# Altium PCB Mainboard.PcbDoc
Units mil, origin at the board's own origin, x right, y up, seen from the top; angles counter-clockwise.
Board outline 2210 x 1600 mil, 2 copper layers (Top Layer, Bottom Layer); 37 components, 49 nets, 203 pads, 62 vias.
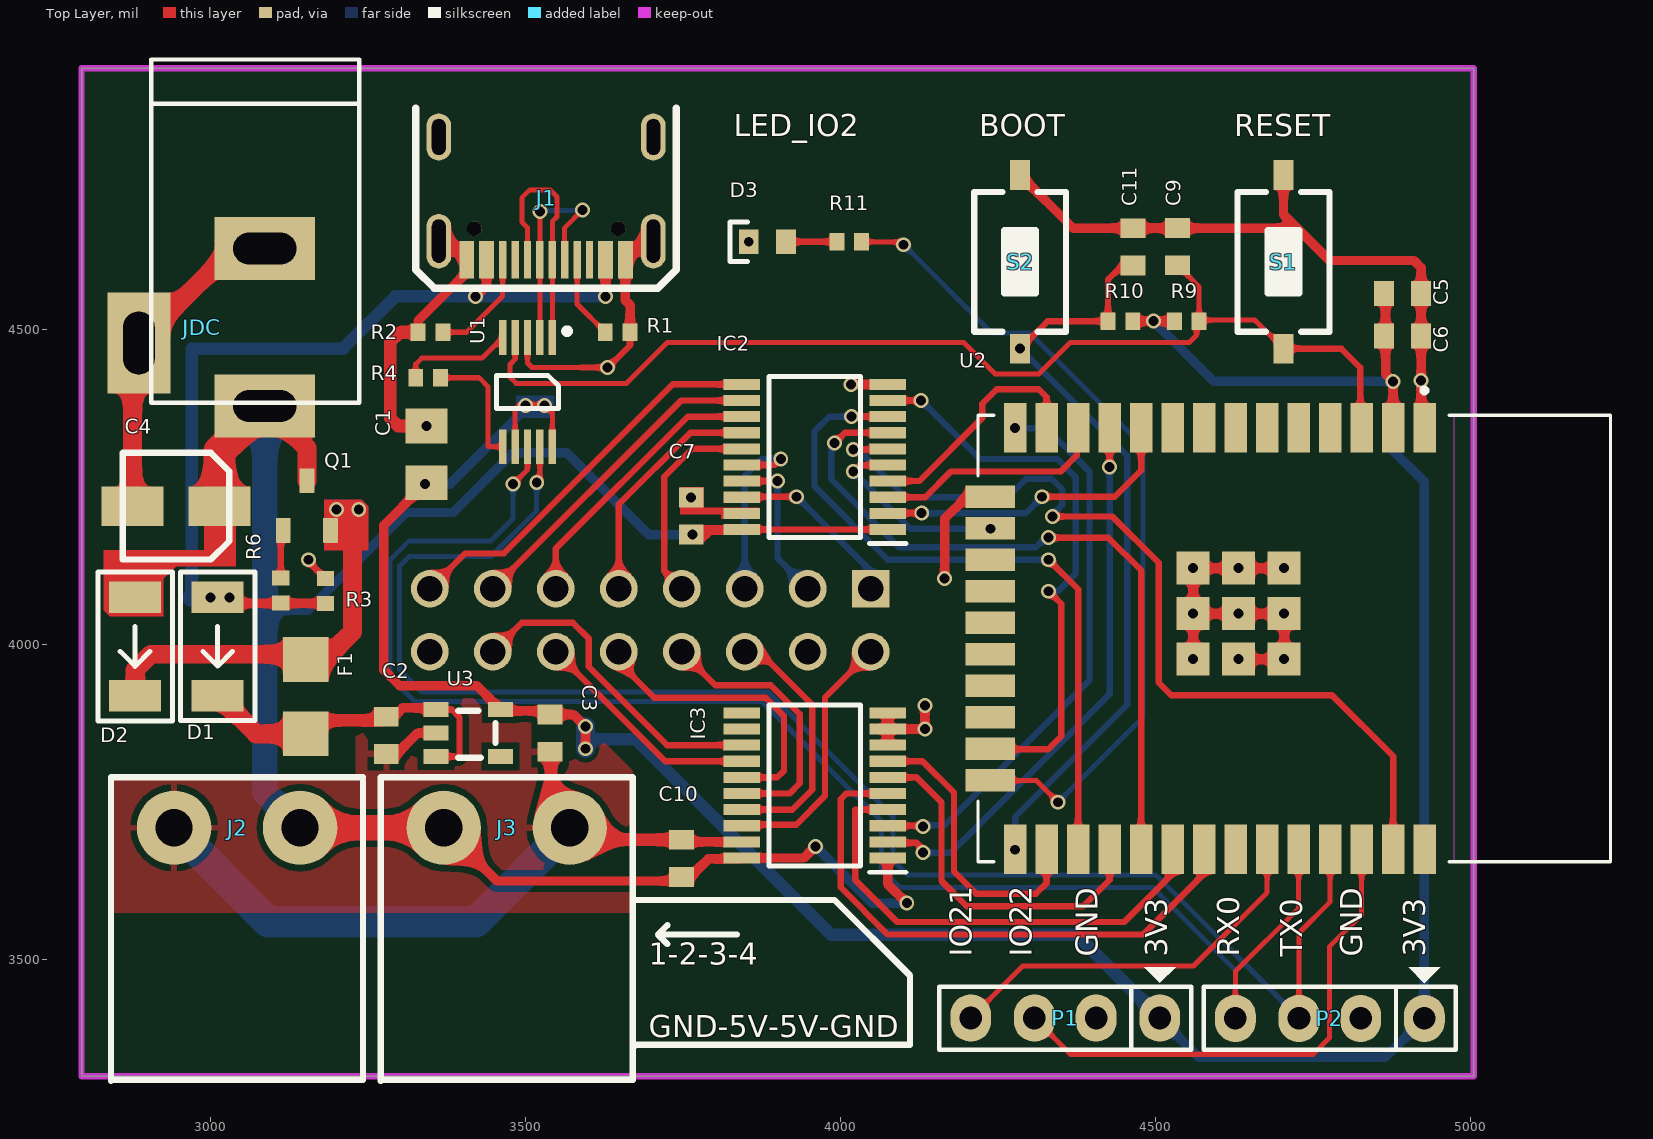
[diagram p0: Top Layer view]
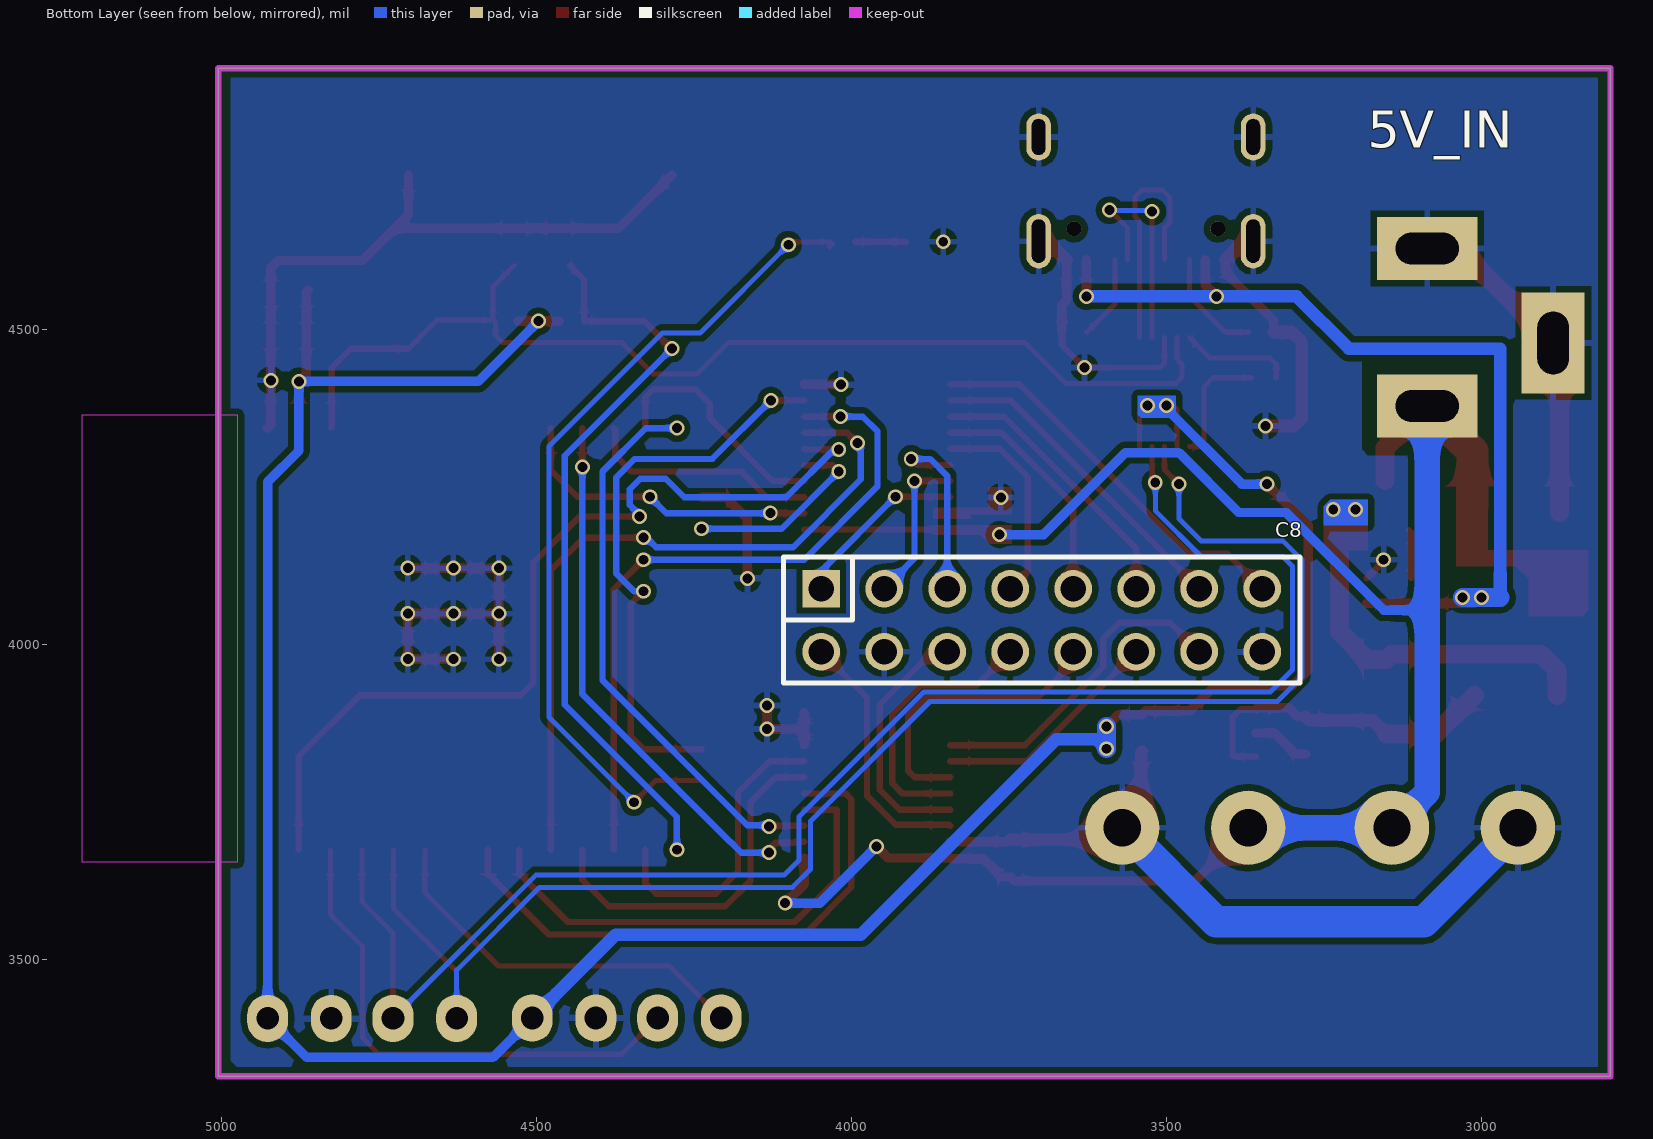
[diagram p1: Bottom Layer view, seen from below]

## Layer stack, top to bottom
Top Solder: solder mask 0.4, Solder Resist, Dk 3.5
Top Layer: signal copper 1.4
Dielectric 1: dielectric 12.6, FR-4, Dk 4.8
Bottom Layer: signal copper 1.4
Bottom Solder: solder mask 0.4, Solder Resist, Dk 3.5

## Board outline
2795,3315 2795,4915 5005,4915 5005,3315

## Design rules (kind name [scope] priority, off if disabled: settings)
Clearance [All] p1: gap=10 ignorepadtopadclearanceinfootprint=FALSE except(0: Arc-Hole Track-Hole SMDPad-Hole THPad-Hole Via-Hole Fill-Hole Poly-Hole Region-Hole Text-Hole; 5: Arc-Arc Arc-Track Arc-Via Track-Track Track-Via)
PolygonConnect [All] p1: connectstyle=Relief reliefconductorwidth=10 reliefentries=4 polygonreliefangle="90 Angle" airgapwidth=10
RoutingVias [All] p1: holewidth=28 width=50 viastyle="Through Hole" minholewidth=28 minwidth=50 maxholewidth=28 maxwidth=50
SolderMaskExpansion [All] p1: expansion=4 istentingtop=FALSE
Width [All] p1: maxlimit=100 minlimit=8 preferedwidth=10
30 further rules are at their usual default settings.

## Components (designator, comment, footprint, x,y, rotation, side; value= is the part's Value field where it differs from the comment)
C1 "1uF" CAP_0805 3342.54,4302.25 r270 top
C2 "100nF" CAP_0603 3278.68,3856.16 r90 top
C3 "100nF" CAP_0603 3538.68,3859.71 r90 top
C4 "1uF" "tu nhom 4 (B)" 2945,4220 r180 top
C5 "100nF" CAP_0603 4891.9,4557.63 r180 top
C6 "100nF" CAP_0603 4891.9,4490.17 r180 top
C7 "1nF" CAP_0603 3762.69,4204.46 r270 top
C8 "JP8x2" JP8-C2T 3697.88,4038.98 r180 bottom
C9 "1nF" CAP_0603 4534.74,4631.9 r90 top
C10 "100nF" CAP_0603 3747.31,3660.94 r90 top
C11 "1nF" CAP_0603 4463.95,4631.74 r90 top
D1 "SS34" "DO-214AC-2 (SMA)" 3011.1,3997.63 r270 top
D2 "SS34" "DO-214AC-2 (SMA)" 2880.04,3997.37 r270 top
D3 "RED" LED_0603_RED 3883.64,4639.72 r0 top
F1 "F1206" FUSE_1206 3150.81,3917.63 r270 top
IC2 "74HC245PW,118" 74hc245pw 3958.89,4298.22 r180 top
IC3 "74HC245PW,118" 74hc245pw 3958.89,3776.73 r180 top
J1 "TYPE-C-31-M-12" TYPE-C-31-M-12 3532.4,4723.39 r180 top
J2 "PW_IN_5V" "DOMINO 2L" 3141.88,3709.5 r180 top
J3 "PW_IN_5V" "DOMINO 2L" 3570,3709.5 r180 top
JDC "Jac DC" DC-IN 2985.88,4504 r270 top
P1 "Header 4" JP4 4406.54,3407.46 r180 top
P2 "UART" JP4 4826.54,3406.96 r180 top
Q1 "FET-P" SSM3J338R,LF-SOT23-F 3152.67,4220.94 r0 top
R1 "5.1K" RES_0402 3646.09,4496.13 r0 top
R2 "5.1K" RES_0402 3348.91,4496.13 r180 top
R3 "100K" RES_0402 3182.22,4085.51 r270 top
R4 "4.7K" RES_0402 3345.2,4423.87 r180 top
R6 "100K" RES_0402 3111.33,4086.29 r90 top
R9 "10K" RES_0402 4549.39,4513.68 r180 top
R10 "10K" RES_0402 4443.94,4513.68 r0 top
R11 "10K" RES_0402 4013.64,4639.72 r0 top
S1 "RESET" SW-SMD 4702.93,4607.88 r270 top
S2 "BOOT" SW-SMD 4284.85,4607.88 r270 top
U1 "CH340E" MSOP-10 3502.87,4401.14 r270 top
U2 "ESP32-WROOM-32D" MODULE_ESP32-WROOM-32D 4720,4010 r270 top
U3 "RT9193-33" RT9193_33 3405,3860 r180 top

## Footprints (in the part's own frame and the unit in brackets; to place one, negate y for a bottom-side part, rotate by r counter-clockwise, add the part's x,y. Pads: shape width x height; smd on the part's side, far side on the other; paste and mask are expansions set on the pad)
74hc245pw [mm] "SOP65P640X110-20N"
  rect 1.475x0.45 smd: 1(-2.938,2.925) 2(-2.938,2.275) 3(-2.938,1.625) 4(-2.938,0.975) 5(-2.938,0.325) 6(-2.938,-0.325) 7(-2.938,-0.975) 8(-2.938,-1.625) 9(-2.938,-2.275) 10(-2.938,-2.925) 11(2.938,-2.925) 12(2.938,-2.275) 13(2.938,-1.625) 14(2.938,-0.975) 15(2.938,-0.325) 16(2.938,0.325) 17(2.938,0.975) 18(2.938,1.625) 19(2.938,2.275) 20(2.938,2.925)
  silkscreen extent -3.67,-3.25 1.85,3.5, body extent -3.21,-3.25 3.21,3.25, height 1
CAP_0603 [mm]
  rect 0.8x1 smd: 1(-0.75,0) 2(0.75,0)
  body extent -0.8,-0.4 0.8,0.4, height 0.51
CAP_0805 [mm]
  rect 1.4x1.7 smd: 1(-1.143,0) 2(1.143,0)
  body extent -1.15,-0.76 1.15,0.79, height 1.01
DC-IN [mil] "Jac DC input"
  rect 100x160 hole 50 slot 100 at 90 deg: 1(125,100) 2(-125,100)
  rect 160x100 hole 50 slot 100 at 0 deg: 3(25,-100)
  silkscreen extent -425,-80 120,250, body extent -410,-105 134,269, height 434
"DO-214AC-2 (SMA)" [mm]
  rect 1.27x2.1 smd: A(-1.985,0) K(1.985,0)
  silkscreen extent -3,-1.5 3,1.5, body extent -2.6,-1.3 2.6,1.3, height 2.42
"DOMINO 2L" [mm]
  round 3 hole 1.5: 1(0,0) 2(5.08,0)
  silkscreen extent -2.54,-2.03 7.62,10.21, body extent -2.5,-1.75 7.58,10.25, height 3.15
FUSE_1206 [mm]
  rect 1.8x1.84 smd: 1(-1.5,0) 2(1.5,0)
  body extent -1.65,-0.82 1.65,0.81, height 0.84
JP4 [mil] "Jumper 4"
  oval 65x75 hole 36: 1(-100,0) 2(1,0) 3(99,0) 4(200,0)
  silkscreen extent -150,-81 250,50, body extent -148,-48 248,50, height 323
JP8-C2T [mm] "16 pins, dual row, straight, gold plating"
  rect 1.52x1.52 hole 1.02: 1(-8.89,1.27)
  round 1.52 hole 1.02: 2(-6.35,1.27) 3(-3.81,1.27) 4(-1.27,1.27) 5(1.27,1.27) 6(3.81,1.27) 7(6.35,1.27) 8(8.89,1.27) 9(8.89,-1.27) 10(6.35,-1.27) 11(3.81,-1.27) 12(1.27,-1.27) 13(-1.27,-1.27) 14(-3.81,-1.27) 15(-6.35,-1.27) 16(-8.89,-1.27)
  silkscreen extent -10.41,-2.54 10.41,2.54, body extent -10.41,-2.54 10.41,2.54, height 8.51
LED_0603_RED [mm]
  rect 0.8x1 smd: A(0.75,0) K(-0.75,0)
  silkscreen extent -1.5,-0.8 -0.8,0.8, body extent -0.8,-0.4 0.8,0.4, height 0.6
MODULE_ESP32-WROOM-32D [mm]
  rect 2x0.9 smd: 1(-8.5,5.26) 2(-8.5,3.99) 3(-8.5,2.72) 4(-8.5,1.45) 5(-8.5,0.18) 6(-8.5,-1.09) 7(-8.5,-2.36) 8(-8.5,-3.63) 9(-8.5,-4.9) 10(-8.5,-6.17) 11(-8.5,-7.44) 12(-8.5,-8.71) 13(-8.5,-9.98) 14(-8.5,-11.25) 25(8.5,-11.25) 26(8.5,-9.98) 27(8.5,-8.71) 28(8.5,-7.44) 29(8.5,-6.17) 30(8.5,-4.9) 31(8.5,-3.63) 32(8.5,-2.36) 33(8.5,-1.09) 34(8.5,0.18) 35(8.5,1.45) 36(8.5,2.72) 37(8.5,3.99) 38(8.5,5.26)
  rect 0.9x2 smd: 15(-5.715,-12.25) 16(-4.445,-12.25) 17(-3.175,-12.25) 18(-1.905,-12.25) 19(-0.635,-12.25) 20(0.635,-12.25) 21(1.905,-12.25) 22(3.175,-12.25) 23(4.445,-12.25) 24(5.715,-12.25)
  rect 1.33x1.33 smd: 39(-2.835,-0.405) 39(-2.835,-2.24) 39(-2.835,-4.075) 39(-1,-0.405) 39(-1,-2.24) 39(-1,-4.075) 39(0.835,-0.405) 39(0.835,-2.24) 39(0.835,-4.075)
  Keep-Out Layer region: 9,6.45 -9,6.45 -9,12.75 9,12.75
  silkscreen extent -10.1,-12.75 9,12.75, body extent -9,-12.75 9,12.75, height 3.25
MSOP-10 [mm]
  rect 1.4x0.3 smd mask+0.05: 1(-2.2,1) 2(-2.2,0.5) 3(-2.2,0) 4(-2.2,-0.5) 5(-2.2,-1) 6(2.2,-1) 7(2.2,-0.5) 8(2.2,0) 9(2.2,0.5) 10(2.2,1)
  silkscreen extent -2.57,-1.25 0.67,1.71, body extent -2.45,-1.5 2.45,1.5, height 1.15
RES_0402 [mm]
  rect 0.6x0.7 smd: 1(-0.5,0) 2(0.5,0)
  body extent -0.5,-0.25 0.5,0.25, height 0.3
RT9193_33 [mm]
  round 0.4 on Top Overlay: 1(1.2,-1.7)
  rect 1x0.6 smd: 1(1.2,-0.95) 2(1.2,0) 3(1.2,0.95) 4(-1.4,0.95) 5(-1.4,-0.95)
  silkscreen extent -1.2,-0.9 0.3,1, body extent -1.27,-1.46 1.07,1.46, height 1
SSM3J338R,LF-SOT23-F [mm]
  rrect10% 0.6x1 smd mask+0: D(0,1) G(-0.95,-1) S(0.95,-1)
  body extent -1.45,-1.2 1.45,1.2, height 0.91
SW-SMD [mm] "Switch SMD type"
  rect 1.2x0.8 smd: 1(-3.5,0) 2(3.5,0)
  silkscreen extent -2.82,-1.85 2.82,1.85, body extent -3.05,-1.85 3.05,1.85, height 2.5
"tu nhom 4 (B)" [mm]
  rect 2.5x1.6 smd: 1(-1.75,0) 2(1.75,0)
  silkscreen extent -2.15,-2.15 2.15,2.15, body extent -2.31,-2.15 2.29,2.15, height 3.91
TYPE-C-31-M-12 [mm]
  rect 0.6x1.5 smd mask+0.07: A1B12(-3.2,2.85) B1A12(3.2,2.85)
  rect 0.6x1.5 smd mask+0.14: A4B9(-2.4,2.85) B4A9(2.4,2.85)
  rect 0.3x1.5 smd mask+0.14: A5(-1.25,2.85) A6(-0.25,2.85) A7(0.25,2.85) A8(1.25,2.85) B5(1.75,2.85) B6(0.75,2.85) B7(-0.75,2.85) B8(-1.75,2.85)
  round 0.6 hole 0.6 unplated mask+0.3: MH(-2.9,1.6) MH(2.9,1.6)
  oval 1x1.9 hole 0.55 slot 1.45 at 90 deg mask+0.05: SH(-4.325,-2.1) SH(4.325,-2.1)
  oval 1x2.2 hole 0.55 slot 1.75 at 90 deg mask+0.05: SH(-4.325,2.1) SH(4.325,2.1)
  silkscreen extent -5.25,-3.25 5.25,4, body extent -4.47,-4.65 4.47,3.25, height 3.32

## Part data
C1: library part CAP_0805_50V, "Capacitor SMD 0805 50V"
C2 C3 C5 C6 C7 C9 C10 C11: library part CAP_0603_50V, "Capacitor SMD 0603 50V"
C4: library part "Tu Nhom 1uF 50V", "Dán", Chung_Loai=Dán, Don_Vi=Con, Ma_Hang=MH007467, So_Chan=2, Ten_Linh_Kien="Tụ Nhôm 1uF 50V 4x5.4MM"
C8: "WR-PHD 2.54 mm Dual Socket Header", Manufacturer="W¨¹rth Elektronik eiSos GmbH", partNo=61301621821, ComponentLink1 Description=Manufacturer, ComponentLink1URL=http://www.we-online.com, ComponentLink2 Description=Datasheet, ComponentLink2URL=http://katalog.we-online.de/em/datasheet/6130xx21821.pdf, Created by="Karrer Zheng", Created Date="29 March 2013", NoPins=16
D1 D2: library part D_SMA, "Diode SMD SMA (DO-214AA)"
D3: library part LED_0603_RED, "LED 0603 RED SMD"
F1: library part FUSE_PPTC_1206, "Fuse PPTC SMD 1206"
IC2 IC3: "Integrated Circuit", Manufacturer_Name=Nexperia, Mouser Part Number=771-HC245PW118, Arrow Part Number=74HC245PW,118, Arrow Price/Stock=https://www.arrow.com/en/products/74hc245pw118/nexperia?region=nac, Datasheet Link=https://assets.nexperia.com/documents/data-sheet/74HC_HCT245.pdf, Height=1.1mm, Manufacturer_Part_Number=74HC245PW,118, Mouser Price/Stock=https://www.mouser.co.uk/ProductDetail/Nexperia/74HC245PW118?qs=P62ublwmbi81WTOw8gvz3Q%3D%3D
J1: "USB Type C Connector Horizontal SMT", Manufacturer="Koren Hroparts", Manufacturer Part Number=TYPE-C-31-M-12
J2 J3: library part DOMINO2, "WR-TBL Terminal block - serie 311 - 5.08mm", Manufacturer="Würth Elektronik eiSos GmbH", partNo=691311500002, ComponentLink1 Description=Manufacturer, ComponentLink1URL=http://www.we-online.com, ComponentLink2 Description=Datasheet, ComponentLink2URL=http://katalog.we-online.de/em/datasheet/6913115000xx.pdf, Created by="Karrer Zheng", Created Date="9 January 2014", NoPins=02
JDC: library part DCIN, "Jac DC input"
P1: "Header, 4-Pin, Right Angle", LatestRevisionDate=17-Jul-2002, LatestRevisionNote="Re-released for DXP Platform.", Publisher="Altium Limited"
P2: library part "Header 4", "Header, 4-Pin, Right Angle", LatestRevisionDate=17-Jul-2002, LatestRevisionNote="Re-released for DXP Platform.", Publisher="Altium Limited"
Q1: library part SSM3J338R,LF, "MOSFET P-Channel Vds=12V Id=6A", Manufacturer Part Number=Toshiba, Manufacturer=SSM3J338R,LF
R1 R2 R3 R4 R6 R9 R10 R11: library part RES_0402, "Resistor SMD 0402"
S1 S2: library part SW-SMD, "Switch", LatestRevisionDate=17-Jul-2002, LatestRevisionNote="Re-released for DXP Platform.", PackageReference=SPST-2, Published=24-Mar-1999, Publisher="Altium Limited"
U1: "USB-to-UART Transceiver MSOP-10", Manufacturer Part Number=CH340E
U2: "Bluetooth, WiFi 802.11b/g/n, Bluetooth v4.2 +EDR, Class 1, 2 and 3 Transceiver Module 2.4GHz ~ 2.5GHz Integrated", Package="Module Espressif Systems", Availability="In Stock", Check_prices=https://www.snapeda.com/parts/ESP32-WROOM-32D/Espressif+Systems/view-part/?ref=eda, MF="Espressif Systems", MP=ESP32-WROOM-32D, Price=None, Purchase-URL=https://pricing.snapeda.com/search/part/ESP32-WROOM-32D/?ref=eda, SnapEDA_Link=https://www.snapeda.com/parts/ESP32-WROOM-32D/Espressif+Systems/view-part/?ref=snap

## Via types
v1: diameter 23.62, hole 15.75, Top Layer to Bottom Layer, tented both sides, 62 vias

## Nets (pads, with @x,y where several pads share a name; then routed paths per layer and width w, separated by ;. In a path a pad name is that pad's centre, name@x,y a point inside that pad or via, vN(x,y) a via of type N, cw(c..) or ccw(c..) an arc to the next point about the centre after c; other vN are vias at no path point)
3.3VDD: C1.2 C3.2 C5.2 C6.2 P1.1 P2.1 R9.2 R10.2 U1.7 U1.10 U2.2 U3.5 | length 4461
  Top Layer w8: U1.7 3483.18,4373.18 v1@3490,4380 ; v1(3530,4380) 3542.24,4367.76 U1.10
  Top Layer w10: v1@3490,4380 v1(3500,4380) v1(3530,4380)
  Top Layer w15: C1.2 3275,4189.72 3275,3960 3300,3935 3422.52,3935 U3.5 3462.52,3895 3532.93,3895 C3.2 3575.76,3889.24 v1(3595,3870) v1(3595,3835) ; R10.2 v1(4496.66,4513.68) R9.2 ; C5.2@4862.37,4562.63 4865,4560 4865,4430 v1(4876.94,4418.06) U2.2@4876.94,4343.88
  Bottom Layer w10: v1@3500,4375 v1(3500,4380)
  Bottom Layer w15: v1(3340,4255) 3380,4255 v1@3500,4375 ; v1(4496.66,4513.68) 4592.29,4418.06 v1(4876.94,4418.06) 4876.94,4308.06 4926.54,4258.46 P2.1 4864.58,3345 4569.01,3345 P1.1
  Bottom Layer w20: v1(3595,3835) 3610,3850 3675,3850 3985,3540 4374.01,3540 P1.1
  Bottom Layer w30: v1(3595,3835) 3595,3850 v1(3595,3870)
5V_BUS: D1.A J1.A4B9 J1.B4A9 R3.2 R6.1 | length 1440.8
  Top Layer w15: D1.A@3011.1,4065.78 3011.15,4065.83 R3.2 ; v1(3420.63,4553.11) 3437.91,4570.39 J1.B4A9 ; v1(3626.89,4553.11) J1.A4B9
  Bottom Layer w20: 2970,4075 2970,4470 3210,4470 3293.11,4553.11 v1(3420.63,4553.11) v1(3626.89,4553.11)
  Bottom Layer w30: 2970,4075 v1(3030,4075)
  other v1: 3000,4075
+5V: C4.1 C7.2 C10.1 D2.A IC2.1 IC2.20 IC3.1 IC3.20 J2.1 J3.2 JDC.1 Q1.D | length 3465.7
  Top Layer w10: IC2.20 IC2.1
  Top Layer w15: J3.2 3454.5,3625 3740.89,3625 C10.1 3761.42,3631.42 3790,3660 3841.64,3660 IC3.20@3842.45,3660.81 ; IC3.20 3941.57,3661.57 v1(3960,3680) ; IC3.1 4074.56,3620.44 v1(4105,3590)
  Top Layer w30: JDC.1 3152.67,4312.22 Q1.D
  Top Layer w40: D2.A D2.A@2880.04,4076.14 ; J2.1 J3.2
  Top Layer w50: C4.1 3013.9,4307.01 JDC.1
  Bottom Layer w15: 3085.88,4055 3155,4055 3310,4210 3385,4210 3480,4305 3565,4305 3695,4175 v1(3765,4175) ; v1(3960,3680) 4050,3590 v1(4105,3590)
  Bottom Layer w40: JDC.1 3085.88,4055 3085.88,3765.5 J2.1 J3.2
E5V: C2.2 D1.K F1.2 U3.1@3357.75,3897.41 U3.3 | length 518.7
  Top Layer w10: U3.3 3392.6,3822.6 3395,3825 3395,3885 3382.59,3897.41 U3.1@3357.75,3897.41
  Top Layer w15: C2.2@3290.69,3885.69 3305,3900 3355.16,3900 U3.1@3357.75,3897.41
  Top Layer w20: F1.2 3172.23,3880 3272.99,3880 C2.2
  Top Layer w30: D1.K 3072.01,3858.58 F1.2
LED_A: C8.5 IC2.14 | length 376.3
  Top Layer w10: C8.5 3647.88,4222.88 3761.61,4336.61 IC2.14
LED_B: C8.12 IC3.15 | length 472.2
  Top Layer w10: C8.12 3647.88,3972.12 3704.25,3915.75 3880.97,3915.75 3910,3886.72 3910,3800 3899.53,3789.53 IC3.15
LED_B1: C8.2 IC2.17 | length 247.4
  Top Layer w10: IC2.17 v1(3899.83,4259.83)
  Bottom Layer w10: v1(3899.83,4259.83) 3899.83,4137.02 C8.2
LED_B2: C8.4 IC2.15 | length 330.9
  Top Layer w10: C8.4 3720,4116.86 3720,4266.72 3764.3,4311.02 IC2.15
LED_C: C8.6 IC2.13 | length 445.9
  Top Layer w10: C8.6 3547.88,4152.88 3757.2,4362.2 IC2.13
LED_CLK: C8.7 IC2.12 | length 519.1
  Top Layer w10: C8.7 3746.69,4387.79 IC2.12
LED_D: C8.11 IC3.14 | length 367.4
  Top Layer w10: C8.11 3721.74,3815.12 IC3.14
LED_E: C8.13 IC3.16 | length 436.6
  Top Layer w10: C8.13 3801.11,3935.75 3889.25,3935.75 3935,3890 3935,3780 3918.94,3763.94 IC3.16
LED_G1: C8.16 IC3.18 | length 410.5
  Top Layer w10: IC3.18 3844.95,3714.49 3929.49,3714.49 3975,3760 3975,3916.1 C8.16
LED_G2: C8.14 IC3.17 | length 401.8
  Top Layer w10: IC3.17 3923.35,3738.35 3955,3770 3955,3905 3871.02,3988.98 C8.14
LED_LAT: C8.10 IC3.13 | length 521.2
  Top Layer w10: C8.10 3493.9,4035 3575,4035 3600,4010 3600,3965.14 3724.43,3840.71 IC3.13
LED_OE: C8.8 IC2.11 | length 629.7
  Top Layer w10: C8.8 3403.9,4145 3465,4145 3733.38,4413.38 IC2.11
LED_R1: C8.1 IC2.18 | length 281.9
  Top Layer w10: IC2.18 3843.97,4235 v1(3930,4235)
  Bottom Layer w10: v1(3930,4235) 4047.88,4117.12 C8.1
LED_R2: C8.3 IC2.16 | length 313
  Top Layer w10: IC2.16 3895.43,4285.43 v1(3905,4295)
  Bottom Layer w10: C8.3 3847.88,4267.88 3875,4295 v1(3905,4295)
NetC9_1: C9.1 R9.1 S1.2 U1.4 U2.3 | length 1738.6
  Top Layer w8: U1.4 3483.18,4453.18 3475,4445 3475,4425 3485,4415 3660,4415 3725,4480 4195,4480 4245,4430 4315,4430 4365,4480 4553.84,4480 4565,4491.16 R9.1@4565,4511.17 ; C9.1 4569.07,4568.04 4569.07,4515.24 4657.78,4515.24 S1.2 ; U2.3@4825,4345.81 U2.3@4826.94,4343.88
  Top Layer w10: S1.2 4794.91,4470.09 4825,4440 U2.3@4825,4345.81
NetC11_1: C11.1 R10.1 S2.2 U2.25 | length 1195.2
  Top Layer w10: v1(4284.85,4470.09) 4328.45,4513.68 R10.1 4424.25,4579.25 C11.1@4447.21,4602.21
  Bottom Layer w10: v1(4276.94,3674.59) 4276.94,3726.94 4455,3905 4455,4299.94 v1(4284.85,4470.09)
NetD2_K: D2.K F1.1 Q1.S | length 591.4
  Top Layer w10: Q1.S Q1.S@3200,4191.5
  Top Layer w30: D2.K 2880.04,3960.04 2905,3985 3142.49,3985 F1.1 3181.69,3976.69 3225,4020 3225,4156.36 ; Q1.S@3200,4191.5 v1(3200,4215)
  other v1: 3235,4215
NetD3_A: D3.A R11.1 | length 80.8
  Top Layer w10: D3.A R11.1
NetIC2_2: IC2.2 U2.10 | length 498.3
  Top Layer w10: IC2.2 4074.84,4208.94 4128.36,4208.94 v1(4128.65,4209.23) ; v1(4319.78,4235) 4320,4235 4435,4235 4476.94,4276.94 U2.10@4476.94,4343.88
  Bottom Layer w10: v1(4128.65,4209.23) 4129.23,4208.65 4293.65,4208.65 4319.89,4234.89 v1(4319.78,4235)
NetIC2_3: IC2.3 U2.12 | length 372
  Top Layer w10: IC2.3 4134.24,4234.24 4175,4275 4349.41,4275 4375,4300.59 4375,4341.94 U2.12@4376.94,4343.88
NetIC2_4: IC2.4 U2.13 | length 380.3
  Top Layer w10: IC2.4 4124.83,4259.83 4225,4360 4225,4382.53 4248,4405.53 4314.47,4405.53 4326.94,4393.06 U2.13@4326.94,4343.88
NetIC2_5: IC2.5 U2.16 | length 314
  Top Layer w10: v1(4020,4275) 4030,4285 4074.13,4285 IC2.5
  Bottom Layer w10: v1(4020,4275) 4110.77,4184.23 v1(4237.57,4184.23)
NetIC2_6: IC2.6 U2.37 | length 1448.5
  Top Layer w10: v1(4020,4310) 4073.54,4310 IC2.6 ; v1(4336.17,4203.62) 4431.38,4203.62 4505,4130 4505,3940 4525,3920 4780,3920 4876.94,3823.06 U2.37@4876.94,3674.59
  Bottom Layer w10: v1(4020,4310) 4027.47,4310 4103.43,4234.03 4265.19,4234.03 4294.73,4263.57 4335.1,4263.57 4351.94,4246.72 4351.94,4222 4333.85,4203.91 4334.13,4203.62 v1(4336.17,4203.62)
NetIC2_7: IC2.7 U2.29 | length 1158.7
  Top Layer w10: v1(3990,4320) 4006.61,4336.61 IC2.7 ; v1(4330,4170) 4425,4170 4476.94,4118.06 4476.94,3923.06 U2.29@4476.94,3674.59
  Bottom Layer w10: v1(3990,4320) 3984.94,4314.94 3984.94,4262.56 4092.5,4155 4310,4155 4325,4170 v1(4330,4170)
NetIC2_8: IC2.8 U2.27 | length 1112.7
  Top Layer w10: v1(4017.2,4362.2) IC2.8 ; v1(4330,4135) 4376.94,4088.06 U2.27@4376.94,3674.59
  Bottom Layer w10: v1(4017.2,4362.2) 3981.81,4362.2 3958.54,4338.93 3958.54,4251.46 4075,4135 v1(4330,4135)
NetIC2_9: IC2.9 U2.23 | length 915.8
  Top Layer w10: IC2.9 v1(4127.79,4387.79) ; U2.23@4237.57,3834.23 4329.23,3834.23 4350,3855 4350,4065 v1(4330,4085)
  Bottom Layer w10: v1(4127.79,4387.79) 4220.57,4295 4343.7,4295 4373.18,4265.51 4373.18,4113.18 4345,4085 v1(4330,4085)
NetIC3_2: IC3.2 U2.11 | length 890.8
  Top Layer w10: IC3.2 4088.58,3687.17 4090.2,3685.54 4120.4,3685.54 4133.47,3672.47 v1(4131,3670) ; v1(4426.94,4281.94) U2.11@4426.94,4343.88
  Bottom Layer w10: v1(4131,3670) 4135,3670 4174.76,3670 4191.71,3686.96 4191.83,3686.83 4426.94,3921.94 v1(4426.94,4281.94)
NetIC3_3: IC3.3 U2.14 | length 895.3
  Top Layer w10: IC3.3 4131,3712.76 v1(4131,3711.84)
  Bottom Layer w10: v1(4131,3711.84) 4135.67,3711.84 4137.51,3713.68 4165,3713.68 4395,3943.68 4395,4275 4326.12,4343.88 v1(4276.94,4343.88)
NetIC3_4: IC3.4 U2.30 | length 763.6
  Top Layer w10: IC3.4 4023.35,3738.35 4023.35,3626.65 4090,3560 4450,3560 4526.94,3636.94 U2.30@4526.94,3674.59
NetIC3_5: IC3.5 U2.31 | length 904.1
  Top Layer w10: IC3.5 4008.94,3763.94 4000,3755 4000,3615 4075,3540 4480,3540 4576.94,3636.94 U2.31@4576.94,3674.59
NetIC3_6: IC3.6 U2.28 | length 575.3
  Top Layer w10: IC3.6 4120.47,3789.53 4160,3750 4160,3625 4200,3585 4385,3585 4426.94,3626.94 U2.28@4426.94,3674.59
NetIC3_7: IC3.7 U2.26 | length 472.3
  Top Layer w10: IC3.7 4129.88,3815.12 4180,3765 4180,3640 4215,3605 4310,3605 4326.94,3621.94 U2.26@4326.94,3674.59
NetJ1_A5: J1.A5 R1.1 | length 133.6
  Top Layer w8: J1.A5 3581.61,4540.92 R1.1
NetJ1_A6: J1.A6 J1.B6 U1.1 | length 394.5
  Top Layer w8: J1.B6 3502.87,4662.13 3493.9,4671.1 3493.9,4709.48 3506.68,4722.26 3538.66,4722.26 3550,4710.92 3550,4680 3542.24,4672.24 J1.A6 U1.1
NetJ1_A7: J1.A7 J1.B7 U1.2 | length 358.7
  Top Layer w8: U1.2 J1.A7 v1(3522.56,4687.56) ; J1.B7 3561.93,4661.93 v1(3590,4690)
  Bottom Layer w8: v1(3522.56,4687.56) 3524.24,4689.24 3589.24,4689.24 v1(3590,4690)
NetJ1_B5: J1.B5 R2.1 | length 176.4
  Top Layer w8: R2.1 3406.13,4496.13 3463.5,4553.5 J1.B5
NetP1_3: P1.3 U2.36 | length 822.7
  Top Layer w8: P1.3 4365.01,3350 4750,3350 4775.71,3375.71 4775.71,3520.71 4826.94,3571.94 U2.36@4826.94,3674.59
NetP1_4: P1.4 U2.33 | length 620.7
  Top Layer w8: P1.4 4289.08,3490 4560,3490 4676.94,3606.94 U2.33@4676.94,3674.59
NetP2_3: P2.3 U1.9 U2.35 | length 2508.2
  Top Layer w8: v1(3517.55,4257.45) 3522.55,4262.45 U1.9 ; P2.3 4727.54,3542.54 4776.94,3591.94 U2.35@4776.94,3674.59
  Bottom Layer w8: v1(3517.55,4257.45) 3517.55,4212.55 3445,4140 3315,4140 3300,4125 3300,3960 3335,3925 3885,3925 4083,3727 4083,3658.19 4106.94,3634.25 4500.75,3634.25 4727.54,3407.46 P2.3
NetP2_4: P2.4 U1.8 U2.34 | length 2496.8
  Top Layer w8: v1(3480,4255) 3502.87,4277.87 U1.8 ; P2.4 4626.54,3481.54 4726.94,3581.94 U2.34@4726.94,3674.59
  Bottom Layer w8: v1(3480,4255) 3480,4200 3445,4165 3315,4165 3285,4135 3285,3949.02 3324.02,3910 3875,3910 4065,3720 4065,3643.58 4093.58,3615 4495,3615 4626.54,3483.46 P2.4
NetQ1_G: Q1.G R6.2 | length 77.2
  Top Layer w10: R6.2 3111.33,4177.63 Q1.G
NetR4_1: R4.1 U1.6 | length 199.6
  Top Layer w8: R4.1 3426.13,4423.87 3440,4410 3440,4315 3440.47,4314.53 U1.6
NetR4_2: R4.2 U1.5 | length 177.1
  Top Layer w8: R4.2 3325.51,4445.51 3335,4455 3430.74,4455 U1.5
NetR11_2: R11.2 U2.24 | length 1335.5
  Top Layer w8: R11.2@4035,4631.39 4030,4636.39 R11.2 4095.28,4639.72 v1(4100,4635) ; U2.24@4237.57,3784.23 4310.77,3784.23 v1(4345,3750)
  Bottom Layer w8: v1(4100,4635) 4240,4495 4300,4495 4480,4315 4480,3885 v1(4345,3750)
S_GND: C1.1 C2.1 C3.1 C4.2 C5.1 C6.1 C7.1 C8.9 C8.15 C9.2 C10.2 C11.2 D3.K IC2.10 IC2.19 IC3.8 IC3.9 IC3.10 IC3.19 J1.A1B12 J1.B1A12 J1.SH J2.2 J3.1 JDC.2 JDC.3 P1.2 P2.2 R1.2 R2.2 R3.1 S1.1 S2.1 U1.3 U2.1 U2.15 U2.39 U3.2 | length 4681.1
  Top Layer w8: U1.3 3502.87,4447.13 3510,4440 3588.28,4440
  Top Layer w10: v1(3155,4135) 3155,4132.42 R3.1 ; 3588.27,4440.01 v1(3630.01,4440.01) 3665.78,4475.78 R1.2
  Top Layer w15: C2.1 3295.02,3826.64 3328.38,3860 U3.2@3357.75,3860 ; R2.2@3329.22,4505.18 3329.22,4514.22 3406.42,4591.42 J1.B1A12 ; J3.1@3579.51,3699.99 J3.1@3589.03,3690.47 ; J1.A1B12 3658.39,4546.61 3665.78,4539.22 R1.2 ; C10.2 3750.61,3687.17 IC3.19 ; v1(4016.62,4413.38) IC2.10 ; IC3.8@4074.56,3841.48 IC3.9 ; IC3.10 IC3.9 ; v1(4133.7,3903.7) v1(4133.7,3866.3) IC3.9 ; v1(4165,4105) 4165,4200 4199.23,4234.23 U2.15@4237.57,4234.23 ; S2.1 4369.26,4661.27 C11.2 4724.6,4661.27 ; v1(4559.57,3977.13) v1(4559.57,4049.37) ; v1(4631.81,3977.13) v1(4704.06,3977.13) v1(4704.06,4049.37) v1(4631.81,4049.37) v1(4559.57,4049.37) ; S1.1 4702.93,4682.93 4775.87,4610 4910,4610 4921.43,4598.57 C5.1 C6.1 v1(4921.43,4419.78) 4921.43,4349.39 U2.1@4926.94,4343.88 ; v1(4704.06,4121.61) v1(4631.81,4121.61) v1(4559.57,4121.61) v1(4559.57,4049.37)
  Top Layer w20: R2.2 3300.69,4496.13 3284.96,4480.4 3284.96,4360.04 3297.75,4347.25 v1(3342.54,4347.25) ; J1.SH@3362.13,4640.71 3376.89,4640.71 J1.B1A12 ; C3.1 3540,3828.87 3540,3739.5 J3.1 ; J3.1@3589.03,3690.47 C10.2 ; J1.A1B12 3687.91,4640.71 J1.SH@3702.68,4640.71
  Top Layer w30: C4.2@2876.1,4210 2876.1,4469.22 JDC.3 3035.88,4629 JDC.2
  Bottom Layer w50: J2.2 3091.38,3560 3420.5,3560 J3.1
  other v1: 3762.69,4233.98 3854.11,4639.72
pads on no net: IC3.11 IC3.12 J1.A8 J1.B8 J1.MH U2.4 U2.5 U2.6 U2.7 U2.8 U2.9 U2.17 U2.18 U2.19 U2.20 U2.21 U2.22 U2.32 U2.38 U3.1@3357.75,3926.93 U3.4

## Polygon pours and split planes (outlines as drawn)
S_GND on Top Layer "S_GND_L01_P001" (solid, pour order 1): 2840,3790 3230,3790 3230,3880 3265,3915 3610,3915 3610,3860 3670,3800 3670,3575 2845,3575 2840,3580
S_GND on Bottom Layer "S_GND_L02_P000" (solid, remove dead copper, pour order 0): 2815,4900 4985,4900 4985,3340 4975,3330 2815,3330

## Keep-outs
Keep-Out Layer:
  the board outline again, w10

## Other copper
Top Layer:
  region net +5V: 2990,4250 2990,4150 2830,4150 2830,4055 2840,4045 2925,4045 2925,4105 2945,4125 3040,4125 3040,4250
  region net NetD2_K: 3180,4230 3240,4230 3250,4220 3250,4150 3180,4150
  region net S_GND: 3745,4250 3745,4220 3745,4207.33 3810.29,4207.33 3810.29,4200 3870,4200 3870,4217.62 3782.83,4217.63 3782.83,4250
  region net +5V: 3745,4190 3870,4190 3870,4175 3795,4175 3780,4160 3745,4160
Bottom Layer:
  pour cut-out: 2990,4455 3190,4455 3190,4310 3180,4300 2990,4300
  region net 3.3VDD: 3595,3870
  region: 3575,3890
  region net 3.3VDD: 3485,4395 3545,4395 3545,4365 3540,4360 3485,4360
  region net NetD2_K: 3180,4230 3240,4230 3250,4220 3250,4190 3180,4190

## Silkscreen, mask and mechanical layers (free items; w line width, h text height)
Top Overlay:
  lines w10: 3670,3360 3675,3365 4110,3365 4110,3475 3990,3595 3670,3595 3670,3610 ; 3670,3785 3670,3789.5 ; 3725,3525 3710,3540 ; 3835,3540 3710,3540 ; 3710,3540 3725,3555 3710,3540
  text "LED_IO2" at 3830,4795 h60
  text "BOOT" at 4220,4795 h60
  text "RESET" at 4625,4795 h60
  text "IO21" at 4220,3505 h60 r90
  text "IO22" at 4315,3505 h60 r90
  text "GND" at 4420,3505 h60 r90
  text "3V3" at 4530,3505 h60 r90
  text "RX0" at 4645,3505 h60 r90
  text "TX0" at 4745,3505 h60 r90
  text "GND" at 4840,3505 h60 r90
  text "3V3" at 4940,3505 h60 r90
  text "1-2-3-4" at 3695,3480 h60
  text "GND-5V-5V-GND" at 3695,3365 h60
Bottom Overlay:
  text "5V_IN" at 3180,4770 h100
  text "5V_IN" at 3180,4770 h100
Top Paste:
  region: 3180,4230 3240,4230 3250,4220 3250,4150 3180,4150
Top Solder:
  region: 3180,4230 3240,4230 3250,4220 3250,4150 3180,4150

## Text inside footprints (layer, text, board x,y; h text height)
U2: Mechanical 13 "ANTENNA" at 5074.33,4246.22 h70 r270